# Altium PCB SIM800.PcbDoc
Units mm, origin at the board's own origin, x right, y up, seen from the top; angles counter-clockwise.
Board outline 46.23 x 49.89 mm, 2 copper layers (Top Layer, Bottom Layer); 40 components, 26 nets, 197 pads, 41 vias.
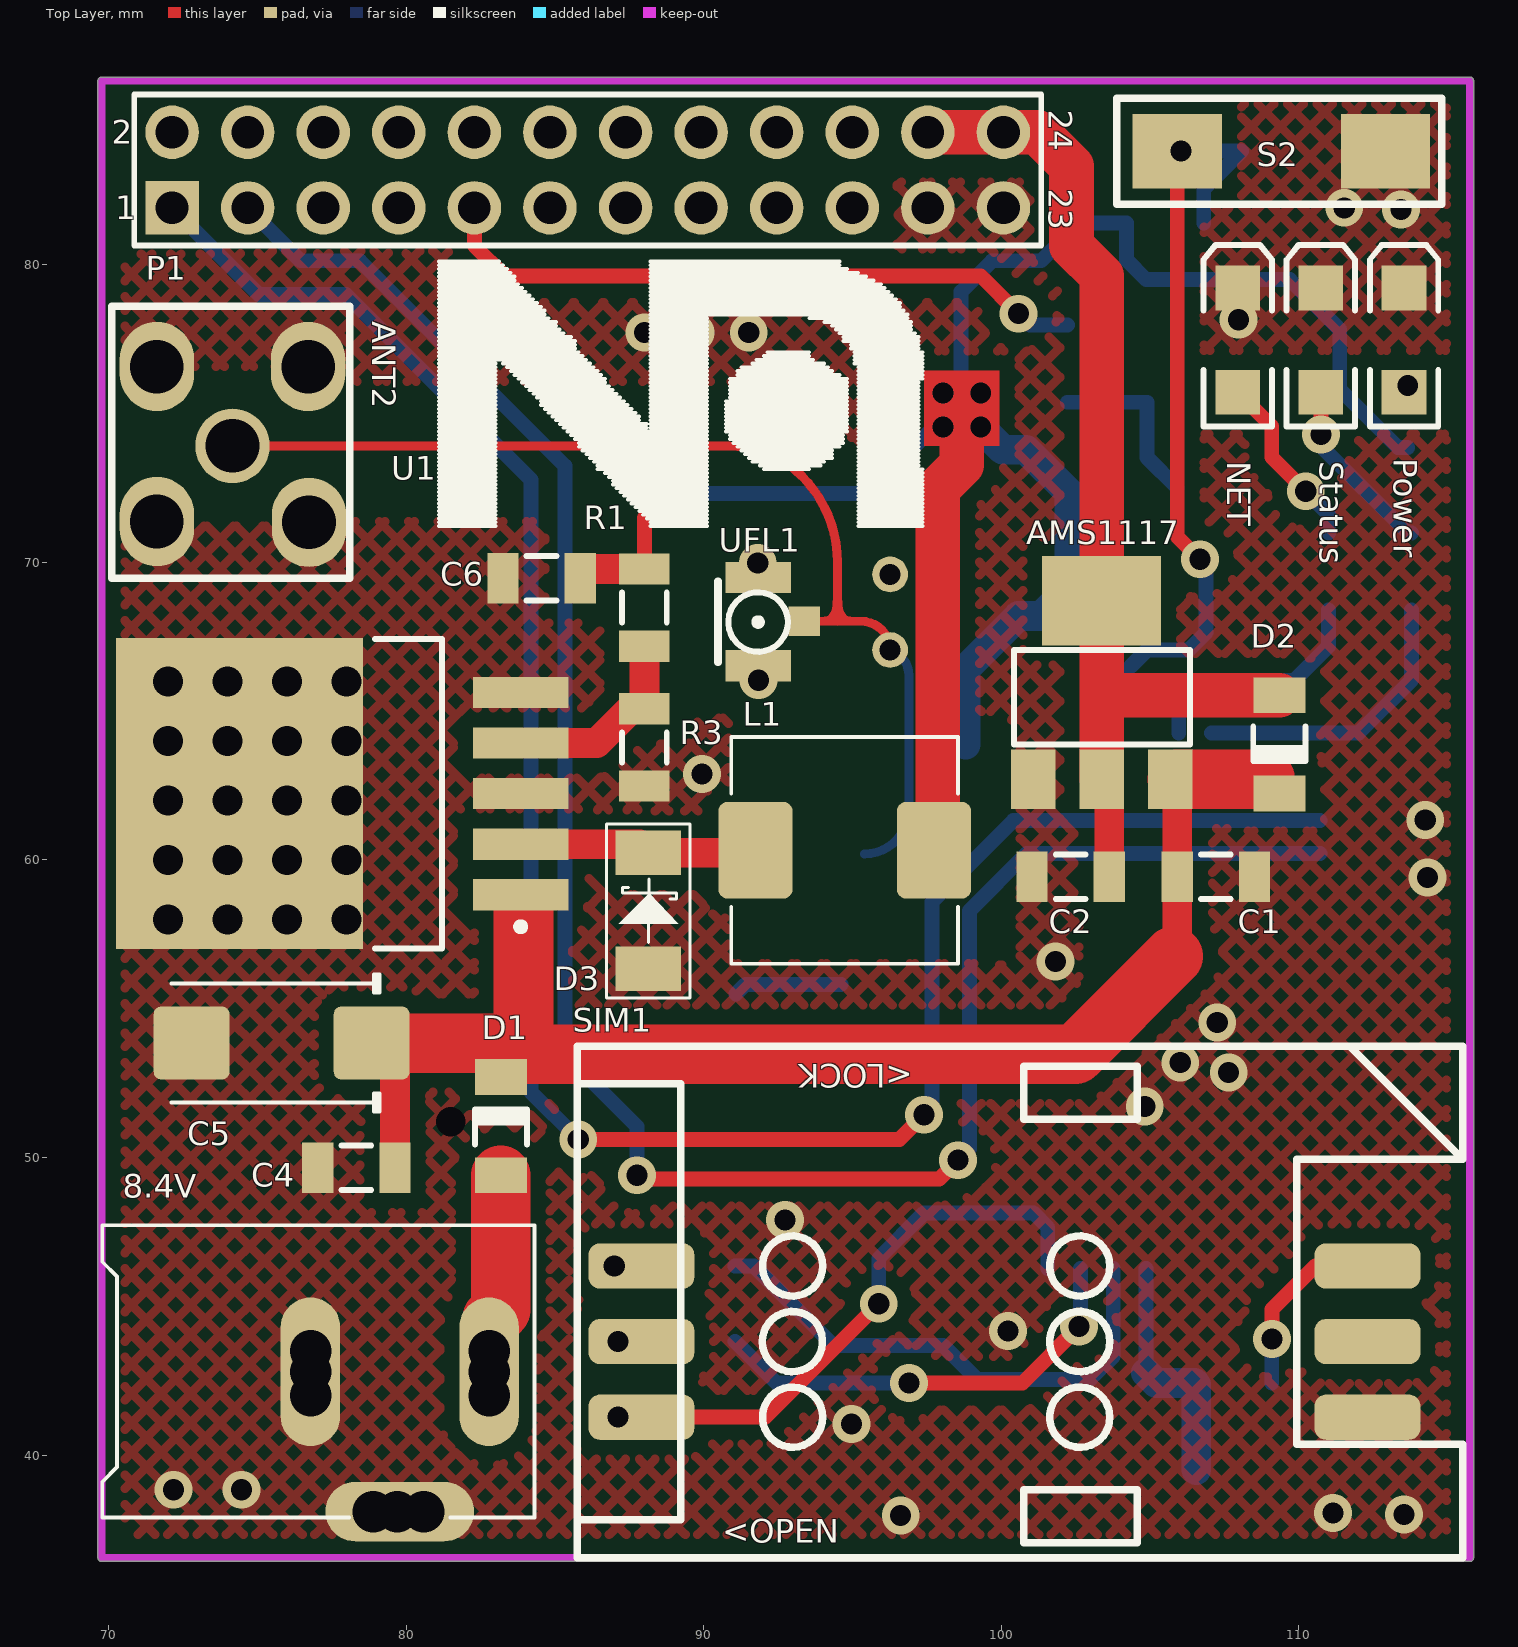
[diagram p0: Top Layer view]
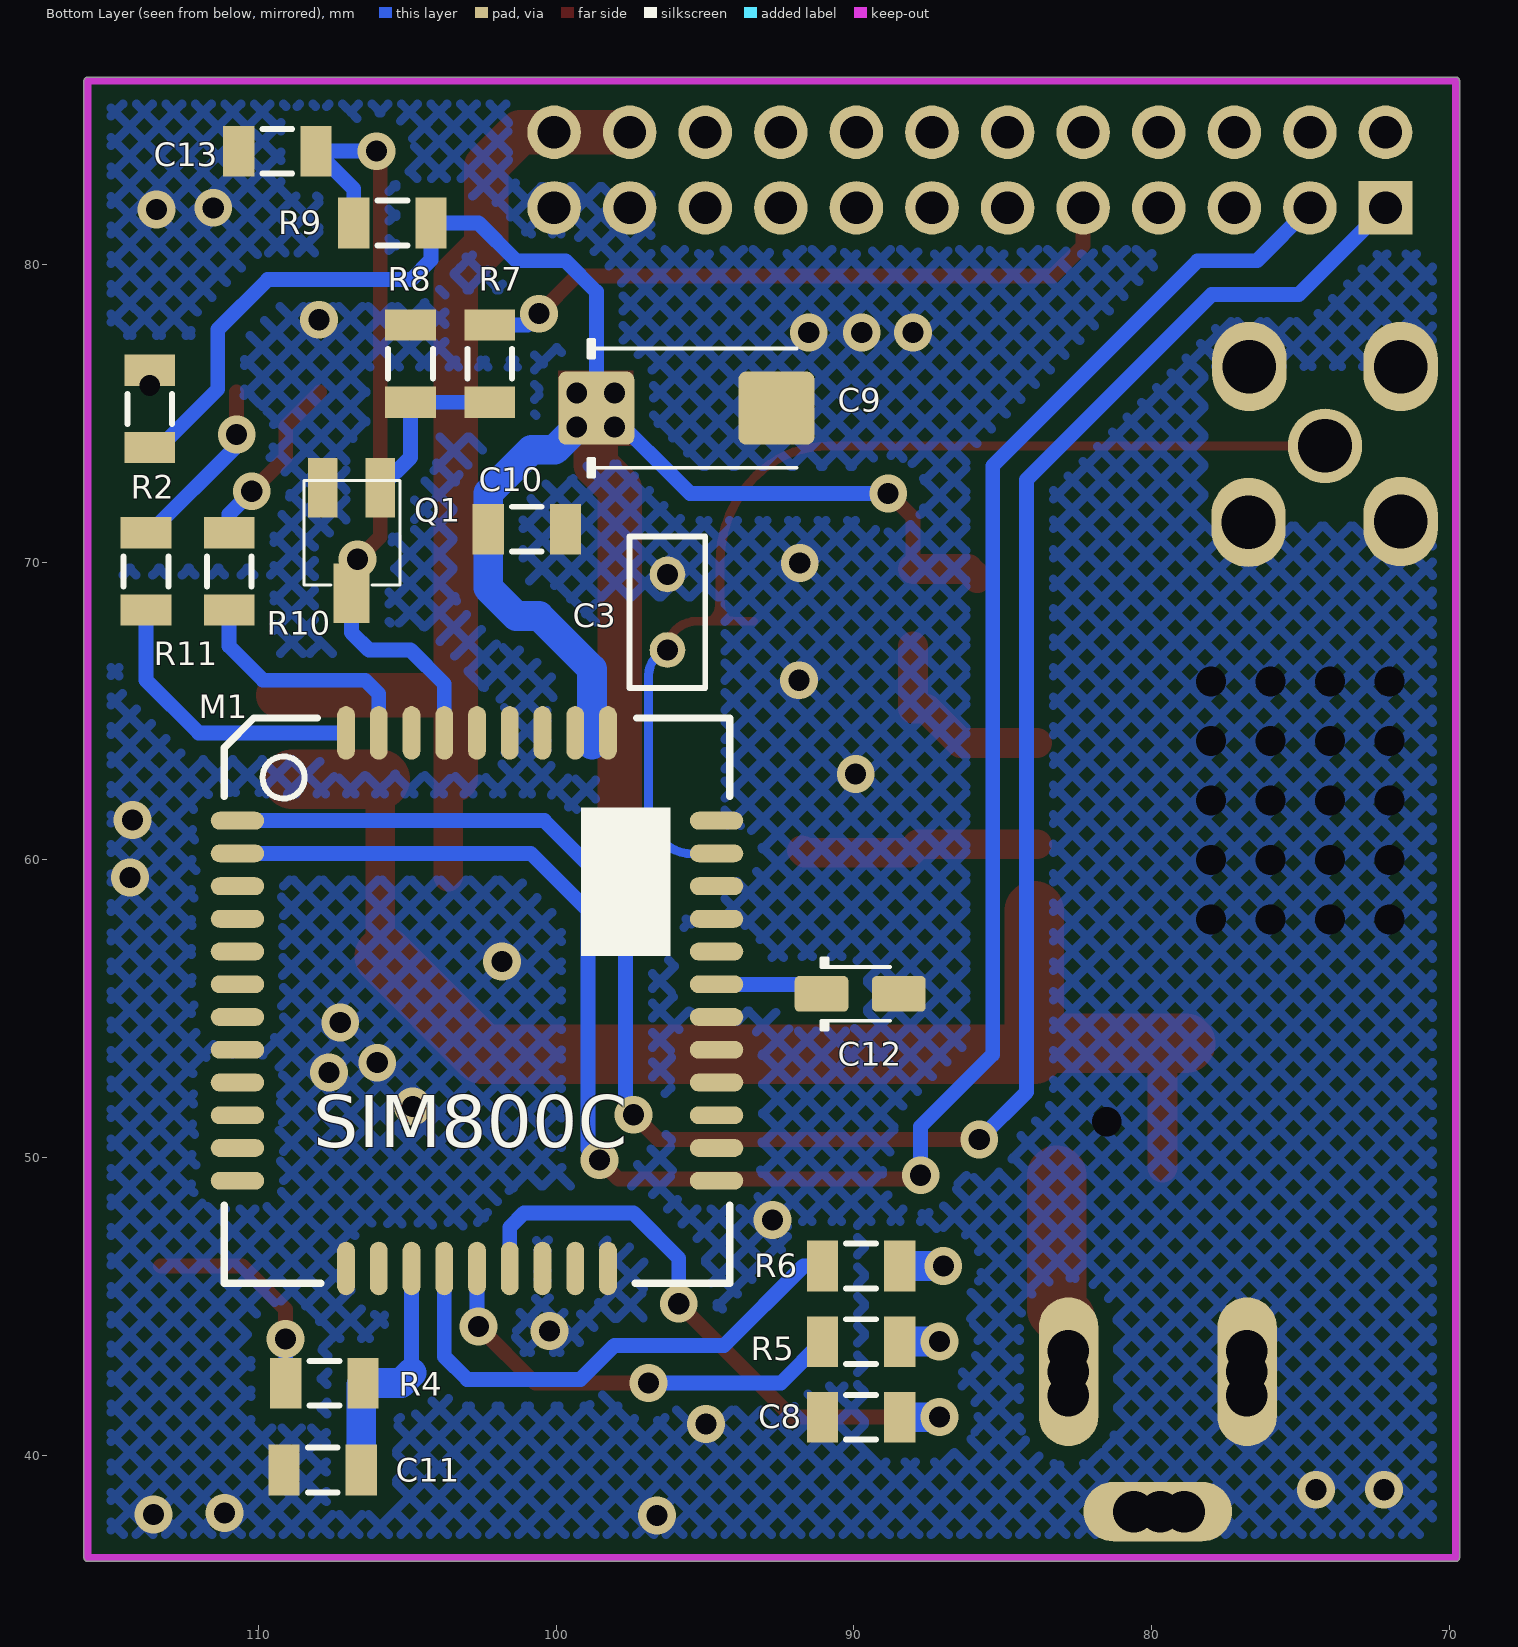
[diagram p1: Bottom Layer view, seen from below]
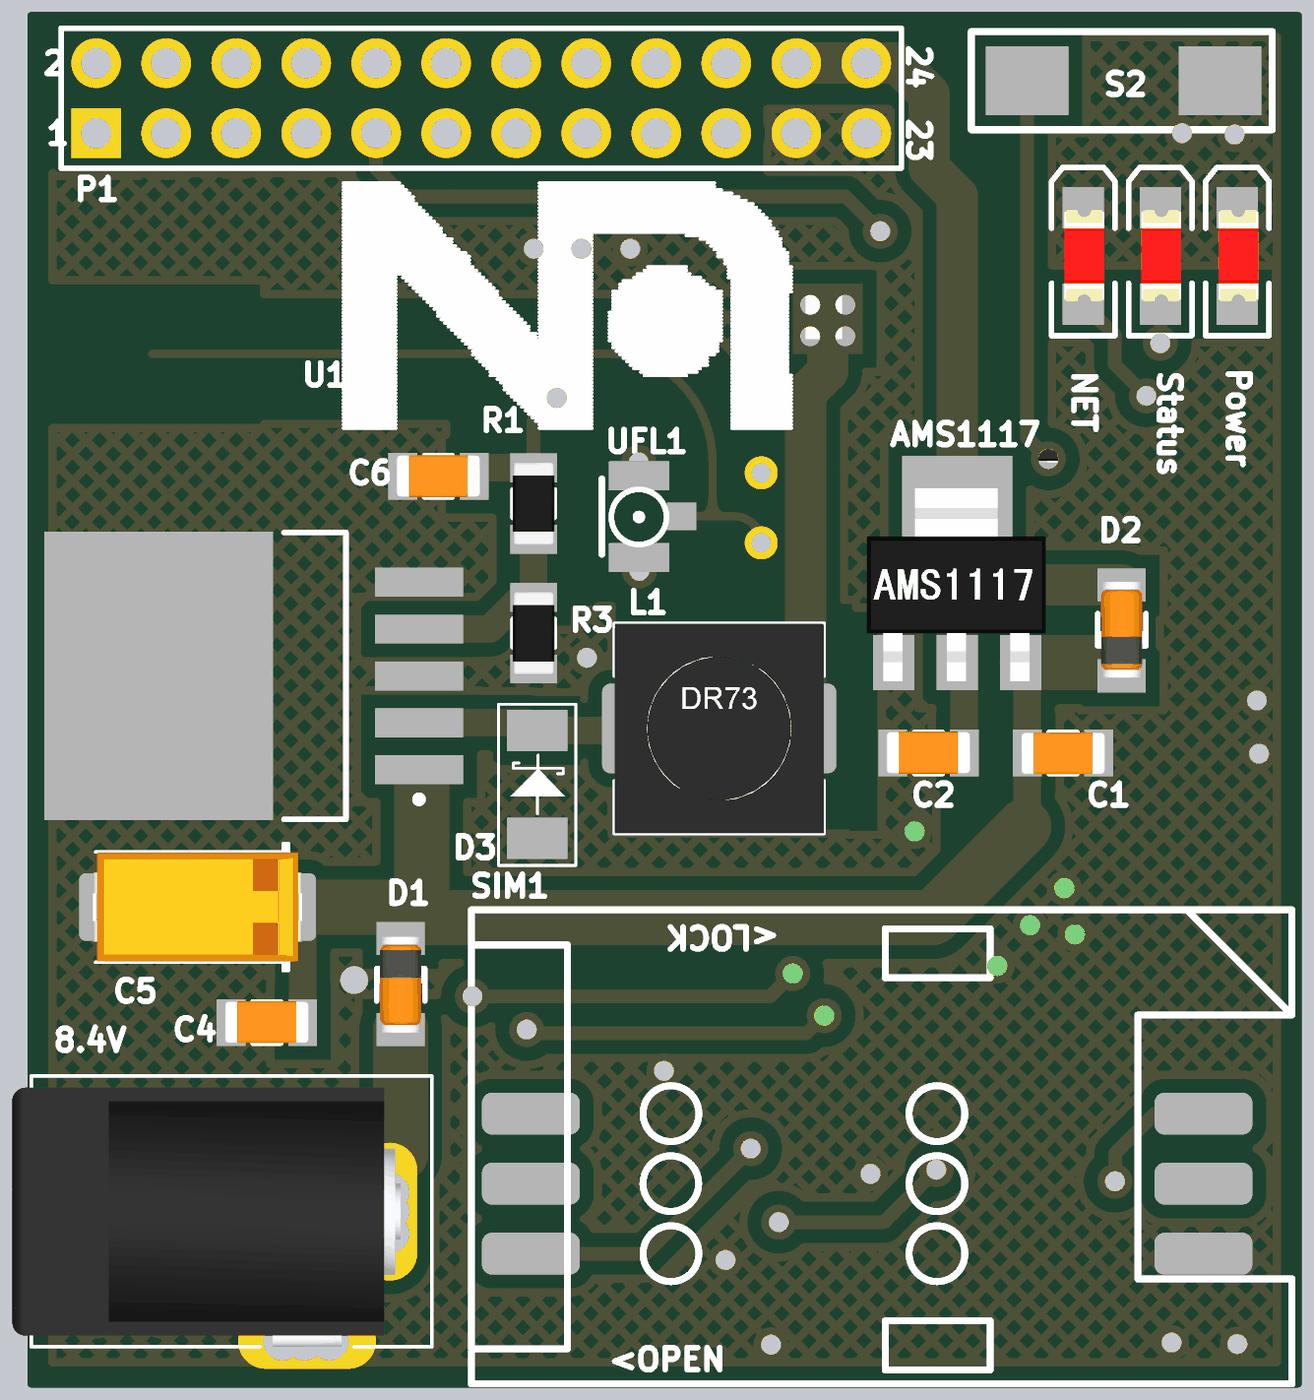
[diagram p2: 3D render of the assembled board from above, using the file's embedded part models]
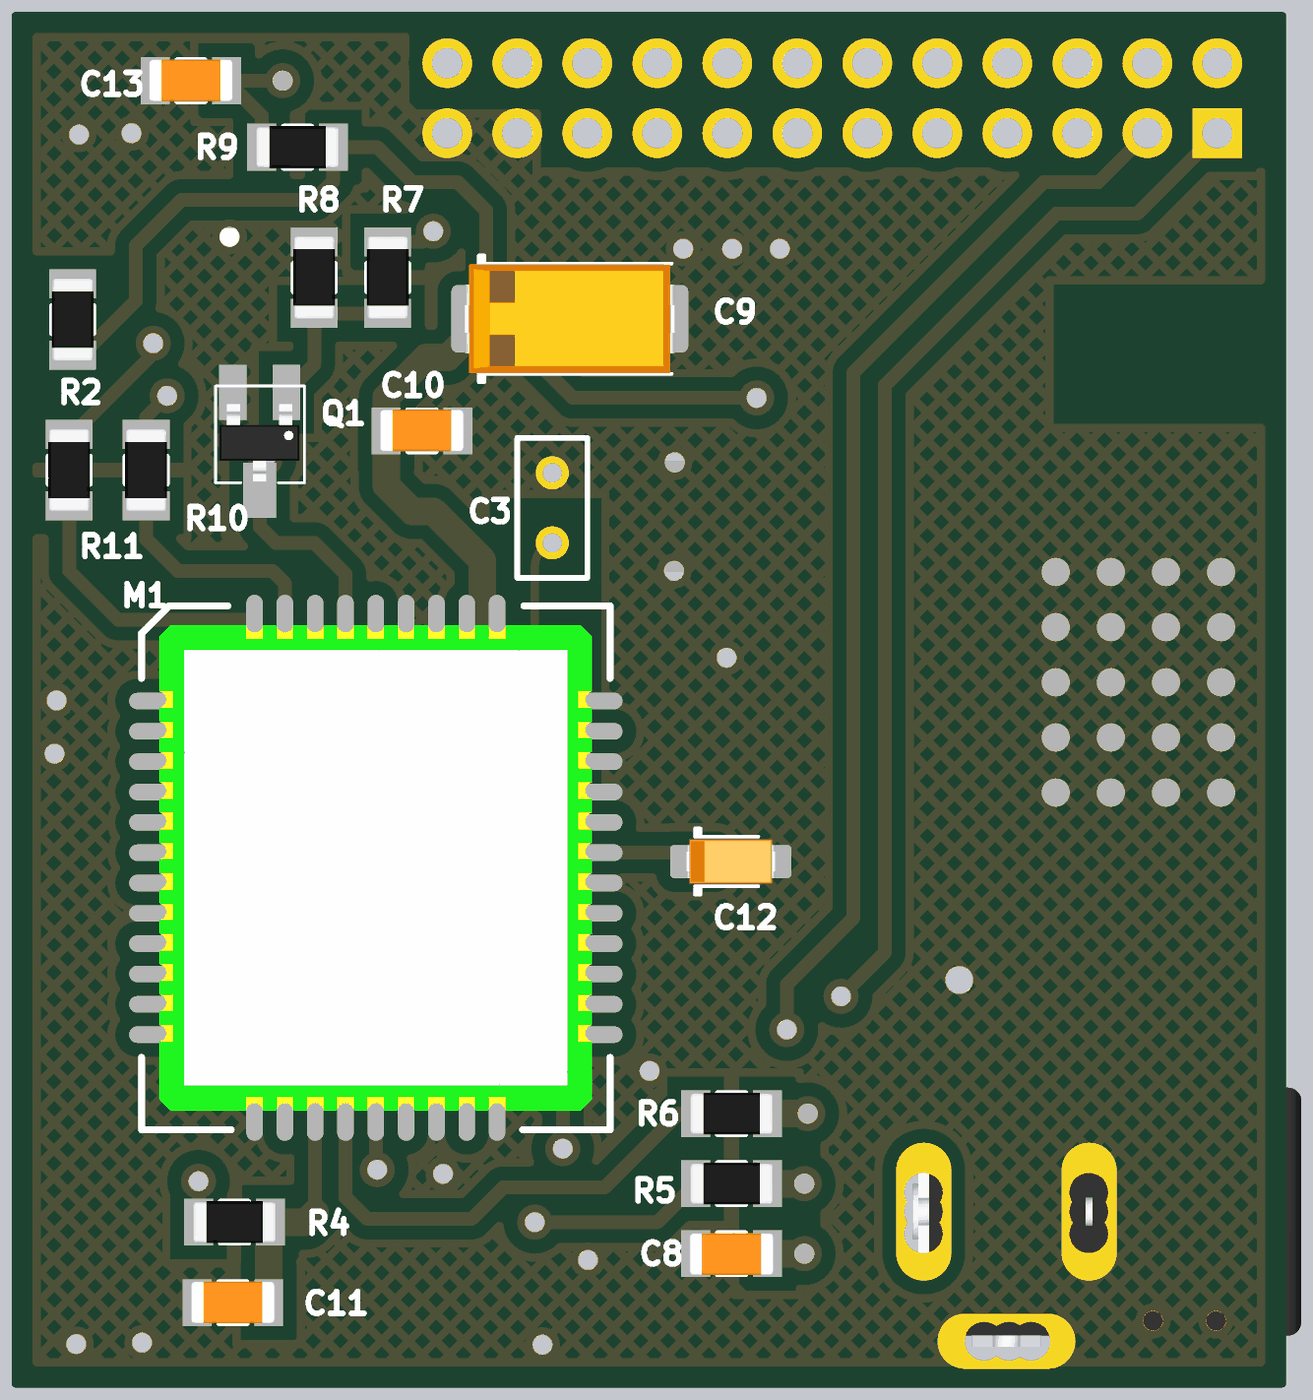
[diagram p3: 3D render of the assembled board from below, using the file's embedded part models]

## Layer stack, top to bottom
Top Solder: solder mask 0.0102, Solder Resist, Dk 3.5
Top Layer: signal copper 0.0356
Dielectric1: dielectric 0.32, FR-4, Dk 4.8
Bottom Layer: signal copper 0.0356
Bottom Solder: solder mask 0.0102, Solder Resist, Dk 3.5

## Board outline
69.646,36.551 ccw(c69.774,36.551) 69.774,36.423 115.748,36.423 ccw(c115.748,36.551) 115.875,36.551 115.875,86.182 ccw(c115.748,86.182) 115.748,86.31 69.774,86.31 ccw(c69.774,86.182) 69.646,86.182

## Design rules (kind name [scope] priority, off if disabled: settings)
Clearance Poly [All vs InPolygon] p1: gap=0.5
Clearance [All] p2: gap=0.254
ComponentClearance [All] p1: gap=0 collisioncheckmode=3 verticalgap=0 showdistances=FALSE
FabricationTestpoint [(IsPad And (OnTopLayer Or OnBottomLayer))] p1: side=3 testpointundercomponent=TRUE minsize=1.016 maxsize=2.54 preferedsize=1.524 minholesize=0 maxholesize=1.016 preferedholesize=0.813 testpointgrid=0.025 allowsidetop=TRUE allowsidebottom=TRUE usegrid=TRUE gridtolerance=0
HoleSize [All] p1: absolutevalues=TRUE maxlimit=2.54 minlimit=0.7 maxpercent=80.000 minpercent=20.000
HoleToHoleClearance [All] p1: gap=0 allowstackedmicrovias=TRUE
MinimumSolderMaskSliver [All] p1: minsoldermaskwidth=0
PlaneConnect [All] p1: planeconnectstyle=Direct reliefexpansion=0.508 reliefentries=4 reliefconductorwidth=0.254 reliefairgap=0.254
PolygonConnect [All] p1: connectstyle=Direct reliefconductorwidth=0.254 reliefentries=4 polygonreliefangle="90 Angle" airgapwidth=0.254
RoutingVias [All] p1: holewidth=0.711 width=1.27 viastyle="Through Hole" minholewidth=0.711 minwidth=1.27 maxholewidth=0.711 maxwidth=1.27
SilkToSilkClearance [All] p1: silktosilkclearance=0
SilkToSolderMaskClearance [IsPad] p1: minsilkscreentomaskgap=0 clearancetoexposedcopper=TRUE
SolderMaskExpansion [All] p1: expansion=0
Width ANT [InNet('NetANT2_2')] p1: maxlimit=2 minlimit=0.3 preferedwidth=0.5 minimp=50.000000 maximp=50.000000 favimp=50.000000
Width Width_1 [All] p2: maxlimit=2 minlimit=0.3 preferedwidth=0.5 minimp=50.000000 maximp=50.000000 favimp=50.000000
22 further rules are at their usual default settings.

## Components (designator, comment, footprint, x,y, rotation, side; value= is the part's Value field where it differs from the comment)
8.4V "DC Jack" CONN_PWR_JACK_2.1x5.5mm 69.088,42.799 r90 top (schematic designator J1)
AMS1117 "AMS1117" "AMS1117 3.3" 103.378,68.707 r0 top (schematic designator AMS1)
ANT2 "Antenna" ANT-R-RF 61.849,78.613 r270 top
C1 "100nF" SMD_CAP_1206 105.918,59.436 r0 top
C2 "100nF" SMD_CAP_1206 103.632,59.436 r180 top
C3 "100nF" RAD-0.1 96.266,68.326 r270 bottom
C4 "100nF" SMD_CAP_1206 79.629,49.657 r180 top
C5 "100uF/10V" CAPMP7343X310N 75.819,53.848 r180 top
C6 "100nF" SMD_CAP_1206 85.852,69.469 r180 top
C8 "100nF" SMD_CAP_1206 91.059,41.275 r180 bottom
C9 "100uF/10V" CAPMP7343X310N 95.631,75.184 r180 bottom
C10 "1u" SMD_CAP_1206 99.695,71.12 r0 bottom
C11 "22pF" SMD_CAP_1206 106.553,39.497 r0 bottom
C12 "100uF/10V" CAPMP3216X180N 89.789,55.499 r180 bottom
C13 "100nF" SMD_CAP_1206 108.077,83.82 r0 bottom
D1 "1N4148" LL4148 83.185,51.054 r90 top
D2 "1N4148" LL4148 109.347,63.881 r270 top
D3 "SS34 SMD" "SCHOTTKY SMD" 88.138,58.293 r180 top
L1 "100uH/3A" IND_WW_DR73 94.742,60.325 r0 top
M1 "SIM800C" Sim800c 102.743,55.245 r180 bottom
NET "Red" "LED SMD 1206" 107.95,77.47 r90 top (schematic designator Net1)
P1 "Header 12X2" HDR2X12 72.136,81.915 r0 top
Power "Red" "LED SMD 1206" 113.538,77.47 r90 top (schematic designator 1)
Q1 "BC817" sot-23 105.918,72.009 r0 bottom
R1 "2K2" SMD_RES_1206 88.011,67.183 r90 top
R2 "" SMD_RES_1206 113.665,76.454 r270 bottom
R3 "1K" SMD_RES_1206 88.011,62.484 r90 top
R4 "22" SMD_RES_1206 109.093,42.418 r180 bottom
R5 "22" SMD_RES_1206 91.059,43.815 r180 bottom
R6 "22" SMD_RES_1206 91.059,46.355 r180 bottom
R7 "1k" SMD_RES_1206 102.235,77.978 r270 bottom
R8 "10k" SMD_RES_1206 104.902,77.978 r270 bottom
R9 "10K" SMD_RES_1206 106.807,81.407 r180 bottom
R10 "" SMD_RES_1206 110.998,70.993 r270 bottom
R11 "" SMD_RES_1206 113.792,70.993 r270 bottom
S2 "KEY" SW-SMD 105.918,83.82 r0 top
SIM1 "SIMCARD6PIN" "Sim Card" 87.884,41.275 r180 top
Status "Red" "LED SMD 1206" 110.744,77.47 r90 top (schematic designator Stat1)
U1 "LM2576S-ADJ" LM2576_SMD 74.803,62.23 r90 top
UFL1 "BNC" ufl-smd 90,40.767 r90 top

## Footprints (in the part's own frame and the unit in brackets; to place one, negate y for a bottom-side part, rotate by r counter-clockwise, add the part's x,y. Pads: shape width x height; smd on the part's side, far side on the other; paste and mask are expansions set on the pad)
"AMS1117 3.3" [mm]
  rect 1.5x2 smd: 1(-2.3,-6) 2(0,-6) 3(2.3,-6)
  rect 4x3 smd: 2(0,0)
  silkscreen extent -2.95,-4.82 2.98,-1.65, body extent -3.28,-6.68 3.22,0.32, height 1.85
ANT-R-RF [mm]
  oval 3x2.5 hole 1.8: 1(2.032,14.859) 1(2.032,9.779) 1(7.239,9.779) 1(7.27,14.89)
  round 2.5 hole 1.8: 2(4.699,12.319)
  silkscreen extent 0,8.25 9.14,16.26
CAPMP3216X180N [mm] "Capacitor, polarized, Molded Body, EIA 535BAAC size A; 3.20mm L X 1.60mm W X 1.80mm H"
  round 0.508 on Mech15: 0(0,0)
  rrect25% 1.8x1.2 smd: 1(-1.3,0) 2(1.3,0)
  silkscreen extent -1.3,-1.2 1,1.2, body extent -1.6,-0.8 1.6,0.8, height 1.8
CAPMP7343X310N [mm]
  round 1 on Mech15: 0(0,0)
  rrect20% 2.55x2.45 smd: 1(-3.025,0) 2(3.025,0)
  silkscreen extent -3.3,-2.3 3.7,2.3, body extent -3.8,-1.97 3.8,1.98, height 3.1
CONN_PWR_JACK_2.1x5.5mm [mm] "Power Connector, 2.1mm ID, 5.5mm OD"
  oval 5x2 hole 1.2: 1(0,-13.7) 2(0,-7.7)
  oval 2x5 hole 1.2: 3(-4.7,-10.7)
  silkscreen extent -4.9,-15.22 4.92,-0.7, body extent -4.9,-14.1 4.5,0, height 11
HDR2X12 [mm] "Connector; Header; 12x2 Position"
  rect 1.8x1.8 hole 1.1: 1(0,0)
  round 1.8 hole 1.1: 2(0,2.54) 3(2.54,0) 4(2.54,2.54) 5(5.08,0) 6(5.08,2.54) 7(7.62,0) 8(7.62,2.54) 9(10.16,0) 10(10.16,2.54) 11(12.7,0) 12(12.7,2.54) 13(15.24,0) 14(15.24,2.54) 15(17.78,0) 16(17.78,2.54) 17(20.32,0) 18(20.32,2.54) 19(22.86,0) 20(22.86,2.54) 21(25.4,0) 22(25.4,2.54) 23(27.94,0) 24(27.94,2.54)
  silkscreen extent -1.27,-1.27 29.21,3.81
IND_WW_DR73 [mm] "Wire-wound power inductor, Cooper Bussmann DR73 series, IPC Medium Density"
  round 0.5 on Mech15: 0(0,0)
  rrect25% 2.5x3.25 smd: 1(-3,0) 2(3,0)
  silkscreen extent -3.81,-3.81 3.81,3.81, body extent -3.8,-3.8 3.8,3.8, height 3.55
"LED SMD 1206" [mm]
  rect 1.5x1.5 smd: 1(-1.75,0) 2(1.75,0)
  silkscreen extent -2.9,-1.15 3.2,1.15, body extent -1.65,-0.76 1.65,0.69, height 1.36
LL4148 [mm]
  rect 1.2x1.75 smd: 1(-1.65,0) 2(1.65,0)
  silkscreen extent -0.61,-0.88 0.57,0.87, body extent -1.78,-0.75 1.72,0.75, height 1.55
LM2576_SMD [mm]
  rect 1.05x3.2 smd: 1(-3.4,-9.048) 2(-1.7,-9.048) 3(0,-9.048) 4(1.7,-9.048) 5(3.4,-9.048)
  rect 10.45x8.3 smd: 6(0,0.402)
  silkscreen extent -5.2,-9.17 5.2,-4.15, body extent -5.2,-6.4 5.2,3, height 4.65
RAD-0.1 [mm] "Radial Cap, Thru-Hole; 2 Leads; 0.1 in Pin Spacing"
  round 1.2 hole 0.7: 1(-1.27,0) 2(1.27,0)
  silkscreen extent -2.54,-1.27 2.54,1.27
"SCHOTTKY SMD" [mm] "LED; 2 Leads"
  rect 2.2x1.5 smd: 1(0,1.95) 2(0,-1.95)
  silkscreen extent -1.4,-2.91 1.4,2.94, body extent -1.4,-2.54 1.37,2.55, height 2.01
Sim800c [mm]
  oval 1.8x0.6 smd: 1(-7.974,6.075) 2(-7.974,4.975) 3(-7.974,3.875) 4(-7.974,2.775) 5(-7.974,1.675) 6(-7.974,0.575) 7(-7.974,-0.525) 8(-7.974,-1.625) 9(-7.974,-2.725) 10(-7.974,-3.825) 11(-7.974,-4.925) 12(-7.974,-6.025) 22(8.126,-6.025) 23(8.126,-4.925) 24(8.126,-3.825) 25(8.126,-2.725) 26(8.126,-1.625) 27(8.126,-0.525) 28(8.126,0.575) 29(8.126,1.675) 30(8.126,2.775) 31(8.126,3.875) 32(8.126,4.975) 33(8.126,6.075)
  oval 0.6x1.8 smd: 13(-4.324,-8.975) 14(-3.224,-8.975) 15(-2.124,-8.975) 16(-1.024,-8.975) 17(0.076,-8.975) 18(1.176,-8.975) 19(2.276,-8.975) 20(3.376,-8.975) 21(4.476,-8.975) 34(4.476,9.025) 35(3.376,9.025) 36(2.276,9.025) 37(1.176,9.025) 38(0.076,9.025) 39(-1.024,9.025) 40(-2.124,9.025) 41(-3.224,9.025) 42(-4.324,9.025)
  silkscreen extent -8.42,-9.47 8.58,9.53, body extent -7.77,-8.77 7.93,8.83, height 1.9
"Sim Card" [mil]
  rrect50% 140x60 smd: 1(-1,0) 2(-1,-100) 3(-1,-200) 4(-961.63,0) 5(-961.63,-100) 6(-961.63,-200)
  silkscreen extent -1088,-491 84,186
SMD_CAP_1206 [mm]
  rect 1.05x1.7 smd: 1(0,0) 2(2.596,0)
  silkscreen extent 0.8,-0.75 1.8,0.75, body extent -0.22,-0.77 2.82,0.75, height 0.75
SMD_RES_1206 [mm] "Chip Resistor, 2-Leads, Body 3.2x1.6mm, IPC High Density _ (0.125 W)"
  rect 1.05x1.7 smd: 1(0,0) 2(2.596,0)
  silkscreen extent 0.8,-0.75 1.8,0.75, body extent -0.23,-0.76 2.82,0.76, height 0.6
sot-23 [mm]
  rect 1x2 smd: 1(0,-0.5) 2(1.93,-0.5)
  rect 1.2x2 smd: 3(0.965,3.04)
  silkscreen extent -0.66,-0.74 2.57,2.77, body extent -0.48,-0.08 2.42,2.72
SW-SMD [mm]
  rect 3x2.5 smd: 1(0,0) 2(7,0)
  silkscreen extent -2.03,-1.78 8.89,1.78
ufl-smd [mm]
  rect 1.05x2.2 smd: 1(25.756,-1.829) 1(28.727,-1.829)
  rect 1x1.06 smd: 2(27.254,-3.378)
  silkscreen extent 25.88,-2.83 28.6,-0.48

## Part data
ANT2: "Right RF Antenna"
C1 C2 C3 C4 C6 C8 C10 C11 C13: library part Cap, "Capacitor"
C5 C9 C12: library part "Cap Pol1", "Polarized Capacitor (Radial)"
D1 D2: library part "Diode 1N4148", "High Conductance Fast Diode"
D3: library part "SS34_SCHOTTKY SMD", "SCHOTTKY RECTIFIER SMD"
L1: library part INDUCTOR, "Inductor"
NET Power Status: library part LED
P1: "Header, 12-Pin, Dual row"
Q1: library part NPN, "NPN Bipolar Transistor"
R1 R3 R7 R8 R9: library part "Res Semi", "Semiconductor Resistor"
R2 R4 R5 R6 R10 R11: library part Resistor, "Resistor"
S2: library part SW-SPST, "Single-Pole, Single-Throw Switch"
U1: library part LM2576S-5.0, "Simple Switcher 3A Step Down Voltage Regulator"
UFL1: "BNC Elbow Connector"

## Free pads (board coordinates)
  round 0 hole 0.7: 6(99.314,75.692) 7(98.044,75.692) 8(98.044,74.549) 9(99.314,74.549) 10(113.665,75.946)
  round 0 hole 1: 27(72,66) 28(74,66) 29(76,66) 30(76,64) 31(74,64) 32(72,64) 33(72,62) 34(74,62) 35(76,62) 36(76,60) 37(74,60) 38(72,60) 39(72,58) 40(74,58) 41(76,58) 42(78,58) 43(78,60) 44(78,62) 45(78,64) 46(78,66) 57(81.5,51.2)
  round 1.524 hole 1.4: 48(76.8,42.8) 49(76.8,43.5) 50(76.8,42) 51(82.8,42.8) 52(82.8,43.5) 53(82.8,42) 54(79.7,38.1) 55(78.9,38.1) 56(80.6,38.1)

## Via types
v1: diameter 1.27, hole 0.711, Top Layer to Bottom Layer, tented both sides, 41 vias

## Nets (pads, with @x,y where several pads share a name; then routed paths per layer and width w, separated by ;. In a path a pad name is that pad's centre, name@x,y a point inside that pad or via, vN(x,y) a via of type N, cw(c..) or ccw(c..) an arc to the next point about the centre after c; other vN are vias at no path point)
+4V: C6.1 C9.1 C10.2 L1.2 M1.34 M1.35 pad.6 pad.7 pad.8 pad.9 R1.2 R2.2 R9.2 | length 71.4
  Top Layer w0.5: R1.2 88.011,71.501 88.849,72.339 v1(88.849,72.314)
  Top Layer w1: C6.1 86.162,69.779 R1.2
  Top Layer w1.5: L1.2 97.87,60.453 97.87,72.47 98.679,73.279 98.679,75.057
  Bottom Layer w0.5: v1(88.849,72.314) 95.504,72.314 98.374,75.184 C9.1 98.656,79.098 99.695,80.137 101.346,80.137 102.616,81.407 R9.2 104.211,80.168 104.877,79.502 109.703,79.502 111.379,77.826 111.379,75.819 113.34,73.858 R2.2
  Bottom Layer w1: C9.1 100.053,73.787 100.838,73.787 102.291,72.334 C10.2 102.291,69.144 101.346,68.199 100.584,68.199 98.806,66.421 98.806,63.881
+5V: AMS1117.2 C2.1 D2.1 P1.22 P1.24 | length 35.3
  Top Layer w1: C2.1 AMS1117.2@103.632,62.453
  Top Layer w1.5: P1.22 P1.24 101.219,84.455 102.362,83.312 102.362,80.645 103.378,79.629 103.378,68.707 AMS1117.2@103.378,62.707 ; 103.379,65.531 D2.1
+8V4: AMS1117.3 C1.1 C4.1 C5.1 D1.2 D2.2 U1.1 | length 44.9
  Top Layer w1: C4.1 C5.1@79.629,53.063 ; 105.791,56.769 105.918,56.896 C1.1 AMS1117.3@105.918,62.467
  Top Layer w2: C5.1 83.565,53.848 ; 83.947,58.293 83.947,53.466 102.488,53.466 105.791,56.769 ; AMS1117.3@105.918,62.707 D2.2@108.871,62.707
GND: 8.4V.2 8.4V.3 AMS1117.1 ANT2.1 C1.2 C2.2 C3.1 C4.2 C5.2 C6.2 C8.1 C9.2 C10.1 C11.2 C12.2 C13.2 D3.1 M1.8 M1.13 M1.19 M1.21 M1.27 M1.30 M1.31 M1.33 M1.36 M1.37 NET.2 P1.21 P1.23 pad.27 pad.28 pad.29 pad.30 pad.31 pad.32 pad.33 pad.34 pad.35 pad.36 pad.37 pad.38 pad.39 pad.40 pad.41 pad.42 pad.43 pad.44 pad.45 pad.46 pad.48 pad.49 pad.50 pad.54 pad.55 pad.56 pad.57 Power.2 Q1.2 R3.1 R8.1 S2.2 SIM1.4 Status.2 U1.3 U1.5 U1.6 UFL1.1
  other v1: 96.622,37.973 113.538,37.998 111.15,38.049 72.187,38.837 74.473,38.837 94.971,41.046 100.228,44.171 92.735,47.904 104.826,51.714 107.645,52.857 106.02,53.188 107.264,54.534 101.829,56.591 114.325,59.411 114.249,61.341 89.941,62.89 91.846,66.04 91.821,69.977 88.011,77.724 89.738,77.724 91.516,77.724 107.975,78.156 113.436,81.864 111.531,81.915
Net1_1: pad.10 Power.1 R2.1
NetANT2_2: ANT2.2 C3.2 M1.32 UFL1.2 | length 36.4
  Top Layer w0.3: ANT2.2 90.852,73.914 cw(c90.852,70.452) 93.3,72.9 cw(c90.403,70.003) 94.5,70.003 94.5,68.021 ; UFL1.2 94.5,68.021 ; C3.2@96.3,67 ccw(c95.279,67) 95.279,68.021 94.5,68.021
  Bottom Layer w0.3: M1.32@95.4,60.2 ccw(c95.4,61.679) 96.879,61.679 ; C3.2@96.068,67.095 cw(c96.003,66.2) 96.9,66.2 96.9,61.7 ; C3.2@96.266,66.998 C3.2
  Bottom Layer w0.5: C3.2@96.2,67 cw(c96.2,66.1) C3.2@96.266,66.998
NetC12_1: C12.1 M1.28 | length 3.7
  Bottom Layer w0.5: C12.1 91.41,55.82 M1.28
NetD1_1: 8.4V.1 D1.1 pad.51 pad.52 pad.53 | length 4.9
  Top Layer w2: 8.4V.1@82.9,44.6 83.185,44.885 D1.1
NetD3_2: D3.2 L1.1 U1.2 | length 8
  Top Layer w1: U1.2 87.851,60.53 D3.2 91.66,60.243 L1.1
NetM1_41: M1.41 R10.2 | length 8.2
  Bottom Layer w0.5: M1.41 105.967,65.581 106.426,66.04 109.855,66.04 110.998,67.183 R10.2
NetM1_42: M1.42 R11.2 | length 9.8
  Bottom Layer w0.5: M1.42 112.022,64.27 113.792,66.04 R11.2
NetNet1_1: NET.1 R10.1 | length 6
  Top Layer w0.5: NET.1 109.093,74.577 109.093,73.533 v1(110.236,72.39)
  Bottom Layer w0.5: v1(110.236,72.39) 110.998,71.628 R10.1
NetQ1_2: Q1.1 R7.2 R8.2 | length 6
  Bottom Layer w0.5: R7.2 R8.2 104.902,73.525 Q1.1
NetR1_1: R1.1 R3.2 U1.4 | length 6.7
  Top Layer w1: U1.4 86.409,63.93 87.559,65.08 R3.2 R1.1
NetR4_1: R4.1 SIM1.6 | length 7.3
  Top Layer w0.5: v1(109.1,43.9) 109.1,44.9 110.555,46.355 SIM1.6@113.309,46.355
  Bottom Layer w0.5: R4.1 109.093,43.893 v1(109.1,43.9)
NetR5_2: R5.2 SIM1.2 | length 1.3
  Bottom Layer w1: v1(87.122,43.815) R5.2
NetR6_2: R6.2 SIM1.3 | length 1.5
  Bottom Layer w1: v1(86.995,46.355) R6.2
NetR11_1: R11.1 Status.1 | length 6.1
  Top Layer w0.5: v1(110.744,74.295) Status.1
  Bottom Layer w0.5: v1(110.744,74.295) 110.744,73.914 113.665,70.993 R11.1
"PWR KEY": C13.1 M1.39 Q1.3 R9.1 S2.1 | length 27
  Top Layer w0.5: S2.1 105.918,70.866 v1(106.68,70.104)
  Bottom Layer w0.5: M1.39 103.767,65.921 104.902,67.056 106.299,67.056 106.883,67.64 Q1.3 106.883,69.901 v1(106.68,70.104) ; v1(106.045,83.82) C13.1 106.807,82.55 R9.1
"SIM RX": M1.2 P1.3 | length 71.3
  Top Layer w0.5: v1(87.757,49.403) 87.884,49.276 97.917,49.276 v1(98.552,49.911)
  Bottom Layer w0.5: P1.3 76.454,80.137 78.448,80.137 85.336,73.249 85.336,53.467 87.757,51.046 v1(87.757,49.403) ; v1(98.552,49.911) 98.933,50.292 98.933,58.293 100.86,60.22 M1.2
"SIM TX": M1.1 P1.1 | length 72.1
  Top Layer w0.5: v1(85.788,50.609) 96.584,50.609 v1(97.409,51.435)
  Bottom Layer w0.5: P1.1 75.049,79.002 77.978,79.002 84.201,72.779 84.201,52.197 v1(85.788,50.609) ; v1(97.409,51.435) 97.671,51.697 97.671,58.587 100.405,61.32 M1.1
SIM_CLK: M1.16 R6.1 | length 17.6
  Bottom Layer w0.5: R6.1 91.694,46.355 94.361,43.688 98.044,43.688 99.187,42.545 102.997,42.545 103.767,43.315 M1.16
SIM_DATA: C11.1 M1.15 R4.2 | length 8.2
  Bottom Layer w0.5: 104.867,42.764 M1.15
  Bottom Layer w1: 104.867,42.764 105.213,42.418 R4.2 106.553,42.362 C11.1
SIM_RST: M1.17 R5.1 | length 14.9
  Top Layer w0.5: v1(96.901,42.418) 100.711,42.418 v1(102.616,44.323)
  Bottom Layer w0.5: R5.1 92.456,42.418 v1(96.901,42.418) ; v1(102.616,44.323) 102.667,44.374 M1.17
SIM_VDD: C8.2 M1.18 SIM1.1 | length 20.3
  Top Layer w0.5: SIM1.1 92.075,41.275 v1(95.885,45.085)
  Bottom Layer w0.5: v1(95.885,45.085) 95.885,46.609 97.409,48.133 101.092,48.133 101.567,47.658 M1.18
  Bottom Layer w1: v1(87.122,41.275) C8.2
"ST PWR": P1.9 R7.1 | length 22.3
  Top Layer w0.5: P1.9 82.296,80.645 83.312,79.629 99.314,79.629 v1(100.584,78.359)
  Bottom Layer w0.5: v1(100.584,78.359) 100.965,77.978 R7.1
pads on no net: C5.0 C9.0 C12.0 L1.0 M1.3 M1.4 M1.5 M1.6 M1.7 M1.9 M1.10 M1.11 M1.12 M1.14 M1.20 M1.22 M1.23 M1.24 M1.25 M1.26 M1.29 M1.38 M1.40 P1.2 P1.4 P1.5 P1.6 P1.7 P1.8 P1.10 P1.11 P1.12 P1.13 P1.14 P1.15 P1.16 P1.17 P1.18 P1.19 P1.20 SIM1.5

## Polygon pours and split planes (outlines as drawn)
GND on Top Layer "Top Layer" (hatched 45Degree grid 0.7 track 0.3, remove dead copper, pour order 0): 69.85,86.741 115.57,86.741 115.57,36.04 69.85,36.04
GND on Bottom Layer "Bottom Layer" (hatched 45Degree grid 0.7 track 0.3, remove dead copper, pour order 2): 69.85,86.741 115.57,86.741 115.57,36.04 69.85,36.04

## Keep-outs
Keep-Out Layer:
  lines w0.254: 69.774,36.551 115.748,36.551 115.748,86.182 69.774,86.182 69.774,36.551

## Other copper
Top Layer:
  rectangle net +4V: 97.409,73.914 99.949,76.454
  pour cut-out: 101.101,84.732 107.693,84.732 108.001,85.039 108.001,86.817 101.244,86.817 101.168,86.741
  pour cut-out: 89.205,64.643 90.246,64.643 90.373,64.77 90.373,71.73 84.912,71.73 84.684,71.501 84.827,71.358 84.827,68.119 86.788,68.119 86.512,67.843 86.512,64.516
  pour cut-out: 69.825,80.391 69.901,80.467 96.495,80.467 96.495,82.779 96.483,82.79 101.101,82.79 101.101,86.674 101.168,86.741 70.053,86.741
  pour cut-out: 104.546,70.485 105.588,70.485 105.308,70.764 105.308,82.398 104.394,82.398 104.165,82.626 104.267,82.728 104.267,85.217 102.921,85.217 102.489,84.785 103.378,83.896 103.378,81.61 104.038,80.95 104.038,79.172 104.343,78.867 104.216,78.74 104.216,70.434
  pour cut-out: 110.722,63.331 110.722,64.589 110.617,64.694 109.55,64.694 109.55,64.643 108.991,64.084 109.55,63.525 109.83,63.525 110.185,63.17 110.236,63.221 110.82,63.221
  pour cut-out: 104.343,61.366 105.131,61.366 105.131,57.912 102.794,55.575 102.616,55.575 102.616,58.212 102.607,58.221 102.679,58.293 104.318,58.293
  pour cut-out: 70.333,76.581 78.232,76.581 78.232,71.222 70.253,71.222
  pour cut-out: 78.232,76.073 93.091,76.073 98.552,70.612 98.552,64.77 89.916,64.77 89.789,64.897 89.789,71.374 78.105,71.374
  pour cut-out: 90.83,64.992 90.83,56.49 90.881,56.439 90.957,56.515 99.7,56.515 99.7,64.992
  pour cut-out: 99.39,56.515 99.441,56.464 100.635,56.464 100.635,64.465 100.876,64.706 99.454,64.706
Bottom Layer:
  pour cut-out: 86.563,41.631 86.385,41.808 86.385,46.914 87.554,46.914 87.63,46.99 87.63,41.986
  pour cut-out: 69.774,80.518 96.647,80.518 96.825,80.34 96.825,82.626 101.244,82.626 101.6,82.982 101.6,86.665 69.926,86.665 69.85,86.741
  pour cut-out: 99.314,61.849 96.012,61.849 96.012,56.642 99.314,56.642
  pour cut-out: 94.34,68.834 98.679,68.834 98.679,58.166 98.533,58.02 94.34,58.02
  pour cut-out: 70.333,76.581 78.232,76.581 78.232,71.222 70.253,71.222

## Silkscreen, mask and mechanical layers (free items; w line width, h text height)
Top Overlay:
  drawing of 248 lines, arcs and shapes, not listed

## Text inside footprints (layer, text, board x,y; h text height)
P1: Top Overlay "1" at 70.231,81.534 h0.8; Top Overlay "2" at 70.104,84.074 h0.8; Top Overlay "23" at 101.6,82.55 h0.8 r270; Top Overlay "24" at 101.6,85.217 h0.8 r270
SIM1: Top Overlay "<OPEN" at 90.627,37.059 h0.8; Top Overlay "<LOCK" at 97.028,53.137 h0.8 r180